# Altium PCB EVL1608C-TL-00A_layout.PcbDoc
Units mil, origin at the board's own origin, x right, y up, seen from the top; angles counter-clockwise.
Board outline 2500 x 2500 mil, 2 copper layers (Top Layer, Bottom Layer); 26 components, 7 nets, 54 pads, 278 vias.
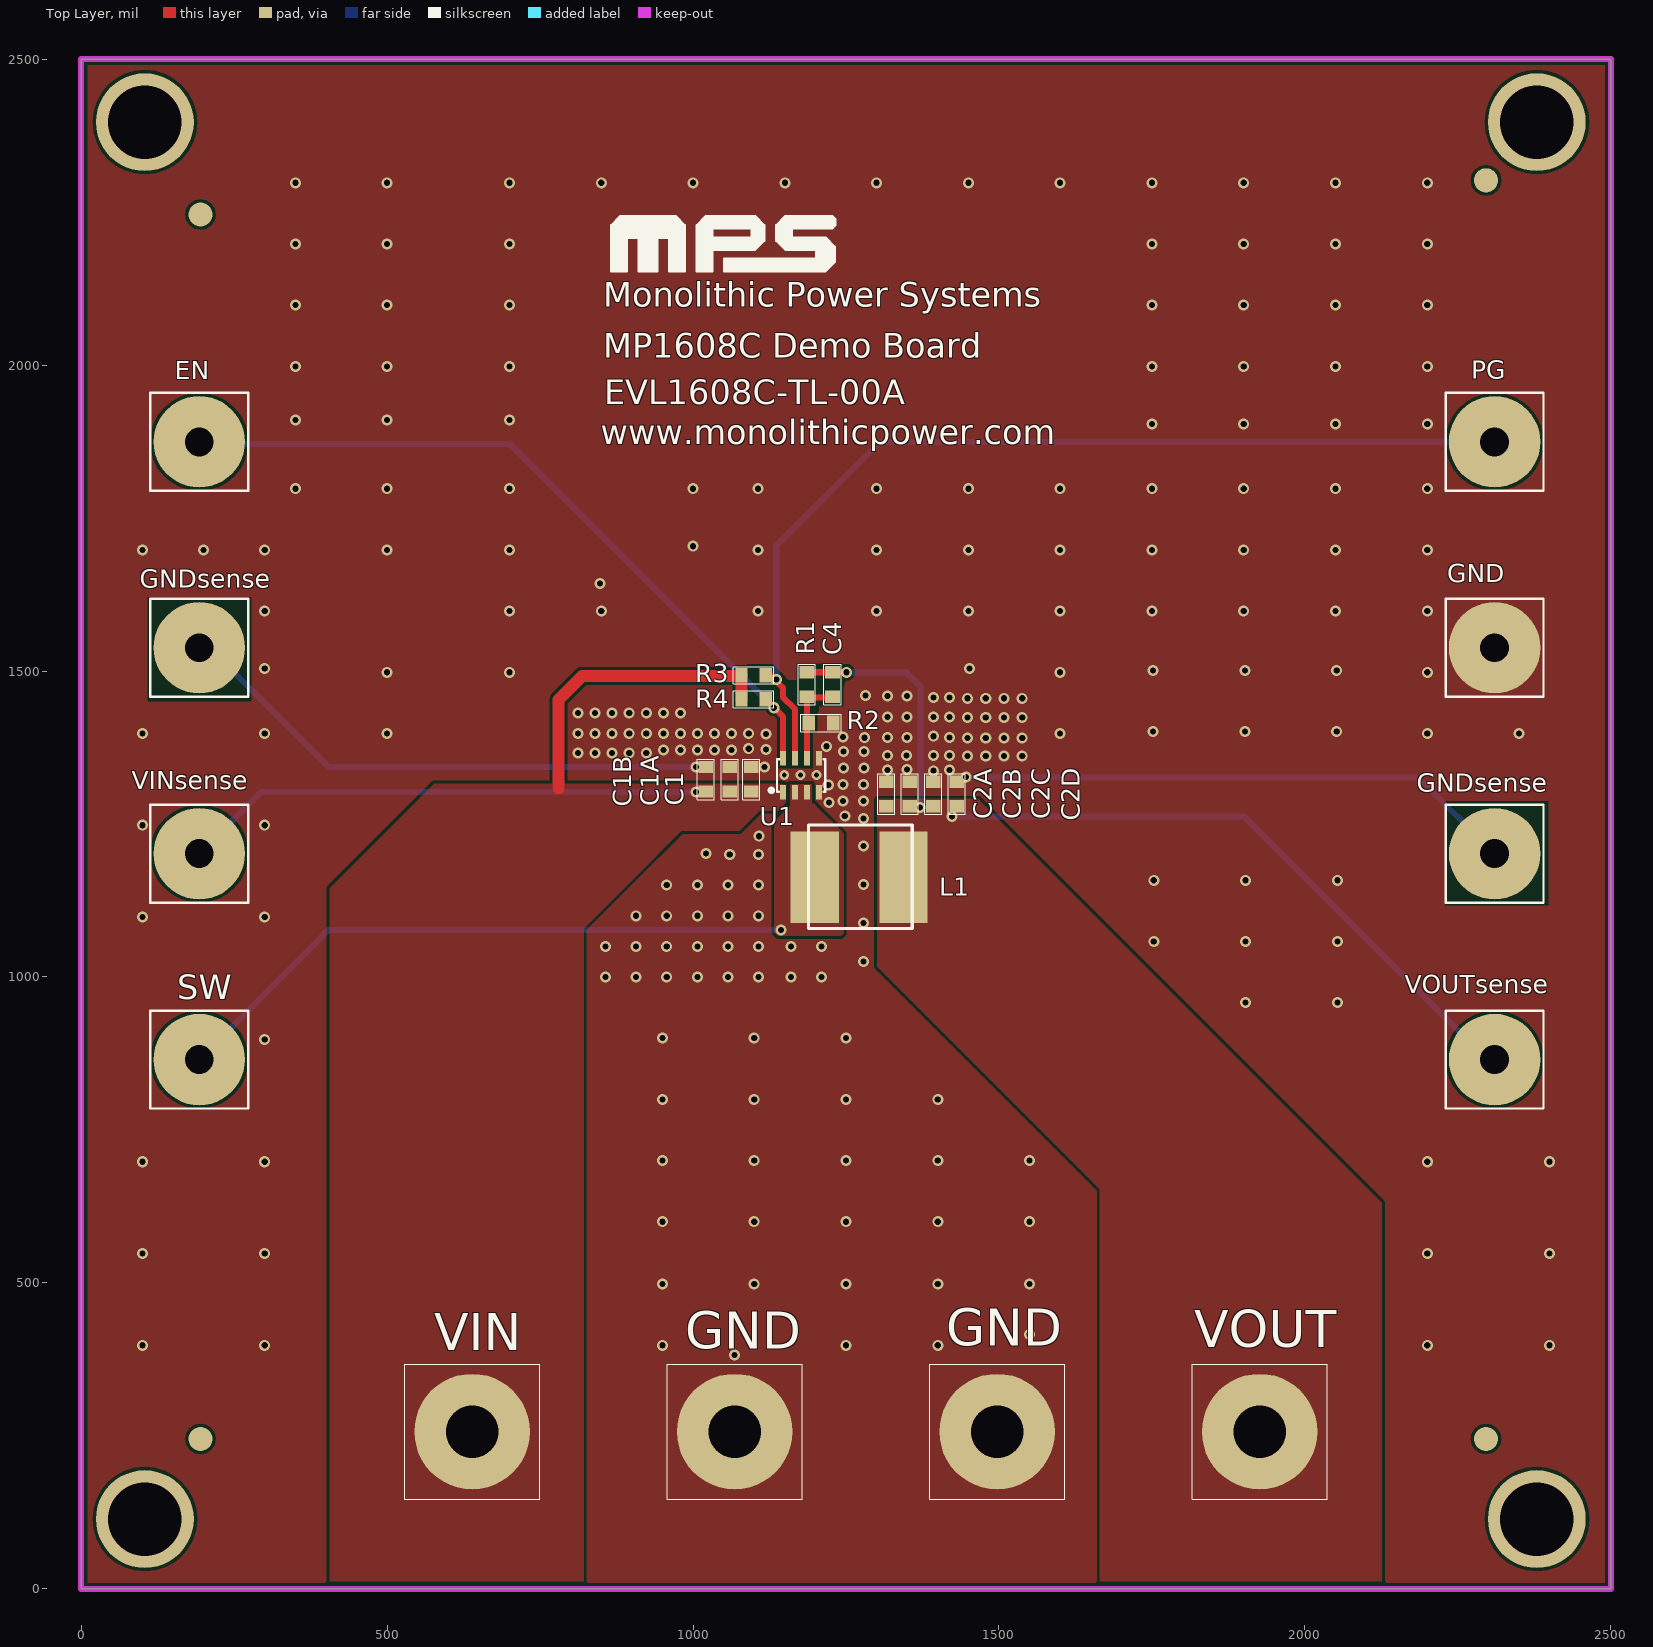
[diagram p0: Top Layer view]
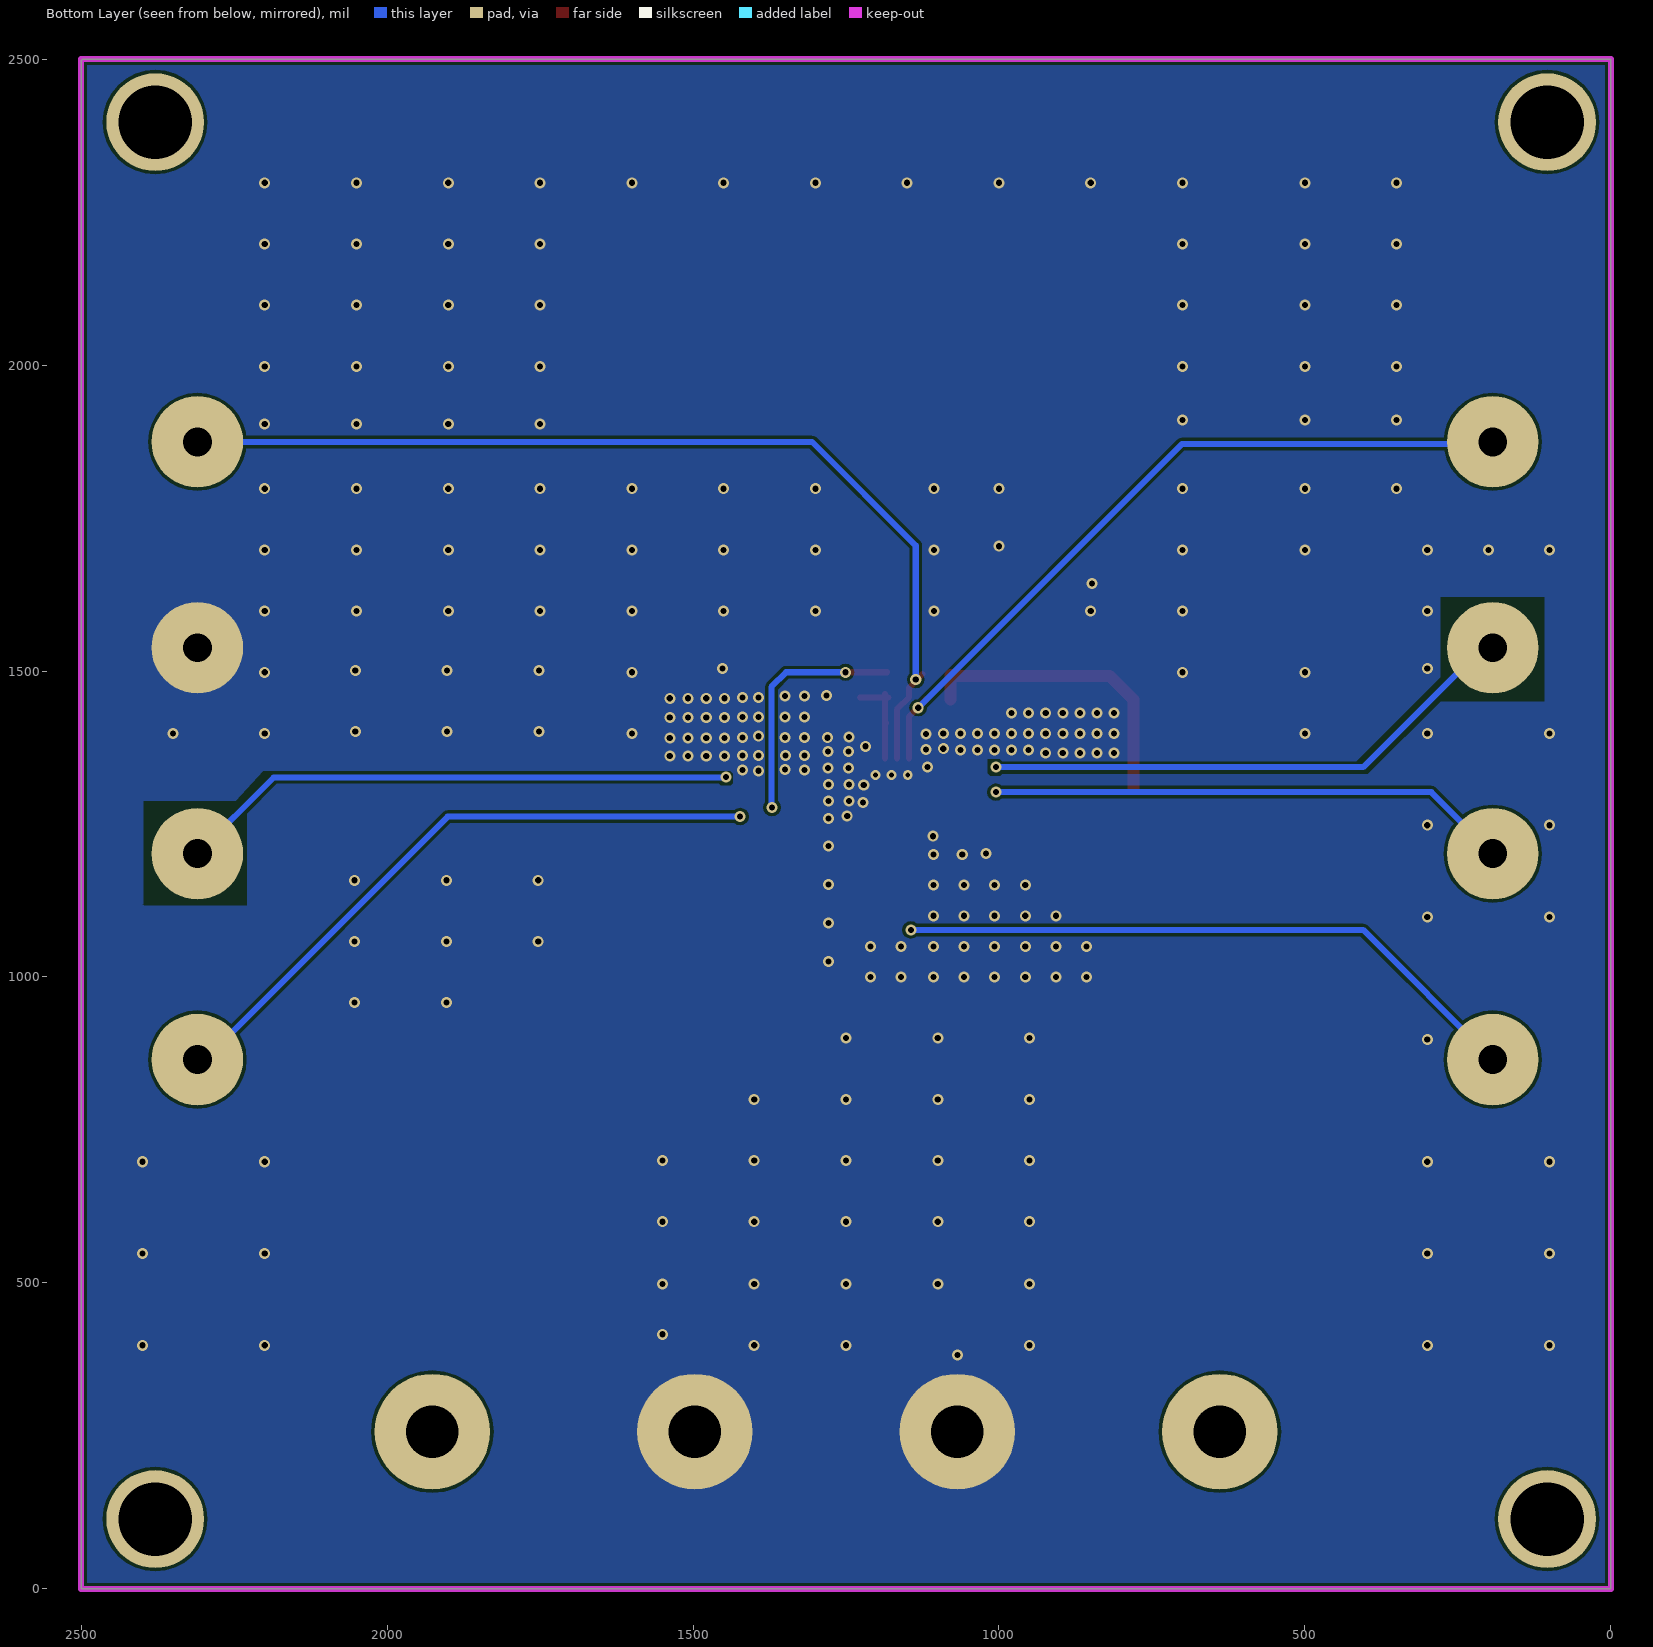
[diagram p1: Bottom Layer view, seen from below]

## Layer stack, top to bottom
Top Layer: signal copper 1.4
Dielectric: dielectric 12.6, FR-4, Dk 4.8
Bottom Layer: signal copper 1.4

## Board outline
0,2500 0,0 2500,0 2500,2498 2498,2500 7,2500

## Design rules (kind name [scope] priority, off if disabled: settings)
Clearance [All] p1: gap=5
ComponentClearance [All] p1: gap=2 collisioncheckmode=3 verticalgap=2 showdistances=FALSE
HoleSize [All] p1: absolutevalues=TRUE maxlimit=200 minlimit=1 maxpercent=80.000 minpercent=20.000
HoleToHoleClearance [All] p1: gap=0 allowstackedmicrovias=TRUE
MinimumSolderMaskSliver [All] p1: minsoldermaskwidth=0
PlaneConnect [All] p1: planeconnectstyle=Direct reliefexpansion=20 reliefentries=4 reliefconductorwidth=10 reliefairgap=10
PolygonConnect [All] p1: connectstyle=Direct reliefconductorwidth=10 reliefentries=4 polygonreliefangle="90 Angle"
RoutingVias [All] p1: holewidth=28 width=50 viastyle="Through Hole" minholewidth=28 minwidth=50 maxholewidth=28 maxwidth=50
SilkToSilkClearance [All] p1: silktosilkclearance=0
SilkscreenOverComponentPads [All] p1: minsilkscreentomaskgap=0
SolderMaskExpansion [All] p1: expansion=4
Width [All] p1: maxlimit=40 minlimit=10 preferedwidth=10
21 further rules are at their usual default settings.

## Classes and differential pairs
component class T-EVL1608-TL-00A: C1 C1A C1B C2A C2B C2C C2D C4 EN GNDsense L1 PG R1 R2 R3 R4 U1 VIN VINsense VOUT VOUTsense

## Components (designator, comment, footprint, x,y, rotation, side; value= is the part's Value field where it differs from the comment)
C1 "Cap" CAP/0402 1095,1343 r270 top
C1A "CAP\0603" CAP/0402 1060,1343 r270 top
C1B "CAP\0603" CAP/0402 1021,1343 r270 top
C2A "Cap" CAP/0402 1316,1319 r270 top
C2B "Cap" CAP/0402 1354.33,1319 r270 top
C2C "Cap" CAP/0402 1392.67,1319 r270 top
C2D "Cap" CAP/0402 1431,1319 r270 top
C4 "" CAP/0402 1228,1498 r270 top
EN "CONN/1MM" TP/1MM 195,1875 r0 top
GND "CONN/1MM" TP/2MM 1497,257 r0 top
GND "CONN/1MM" TP/2MM 1068,257 r0 top
GND "CONN/1MM" TP/1MM 2310.43,1536.07 r270 top
GNDsense "CONN/1MM" TP/1MM 195,1538.48 r0 top (schematic designator GND)
GNDsense "CONN/1MM" TP/1MM 2312,1201.95 r0 top (schematic designator GND)
L1 "COILCRAFT/LPO2506IB-682" MPL-AL4020-R47 1201,1164 r0 top
PG "CONN/1MM" TP/1MM 2312,1875 r0 top
R1 "RC(0603_50V0805_150V1206_200V2512_200V" RES/0402 1186,1457.98 r90 top
R2 "RC(0603_50V0805_150V1206_200V2512_200V" RES/0402 1229,1415 r180 top
R3 "RC(0603_50V0805_150V1206_200V2512_200V" RES/0402 1079,1493 r0 top
R4 "RC(0603_50V0805_150V1206_200V2512_200V" RES/0402 1079,1454 r0 top
SW "CONN/1MM" TP/1MM 191.02,864.59 r180 top
U1 "MP1608" SOT583 1147,1302 r90 top
VIN "CONN/2MM" TP/2MM 639,257 r0 top
VINsense "CONN/1MM" TP/1MM 192.59,1203.52 r90 top
VOUT "CONN/2MM" TP/2MM 1926,257 r0 top (schematic designator VOUT2)
VOUTsense "CONN/1MM" TP/1MM 2312,865.43 r0 top

## Footprints (in the part's own frame and the unit in brackets; to place one, negate y for a bottom-side part, rotate by r counter-clockwise, add the part's x,y. Pads: shape width x height; smd on the part's side, far side on the other; paste and mask are expansions set on the pad)
CAP/0402 [mil]
  rect 20x24 smd paste+0 mask+0: 1(0,0) 2(40,0)
  silkscreen extent -13,-14 53,14
MPL-AL4020-R47 [mil]
  rect 78.74x149.61 smd mask+2: 1(-2,-1) 2(143,-1)
  silkscreen extent -12,-85 157,84
RES/0402 [mil]
  rect 20x24 smd paste-1000: 1(0,0) 2(40,0)
  silkscreen extent -13,-14 53,14
SOT583 [mm]
  rect 0.6x0.25 smd mask+0.051: 1(0,0) 2(0,-0.5) 3(0,-1) 4(0,-1.5) 5(1.4,-1.5) 6(1.4,-1) 7(1.4,-0.5) 8(1.4,0)
  silkscreen extent 0.03,-1.75 1.37,0.51
TP/1MM [mm]
  round 3.8 hole 1.2 paste-0.05 mask+0.05: 1(-0.051,-0.011)
  silkscreen extent -2.08,-2.04 1.98,2.02
TP/2MM [mm]
  round 4.8 hole 2.184: 1(0,0)
  silkscreen extent -2.8,-2.8 2.8,2.8

## Part data
C1 C2A C2B C2C C2D: "50V Ceramic Capacitor"
C1A C1B: library part CAP0603, "CAP0603"
C4: library part CAP/0402, "{Description}"
EN GND GND GND GNDsense GNDsense PG SW VINsense VOUTsense: library part CONN/2MM, "{Description}"
L1: library part TOKO106C, "TOKO106C"
R1 R2 R3 R4: library part SMR, "Film resistor, 1%"
VIN VOUT: "{Description}"

## Free pads (board coordinates)
  round 160 hole 120: 0(104,114) 0(104,2397) 0(2379,114) 0(2379,2397)
  round 39.37 smd mask+2: 1(195,2246) 2(2296,2302) 3(2296,245) 4(195,245)

## Via types
v1: diameter 18, hole 10, Top Layer to Bottom Layer, tented both sides, 275 vias
v2: diameter 16, hole 8, Top Layer to Bottom Layer, tented both sides, 3 vias

## Nets (pads, with @x,y where several pads share a name; then routed paths per layer and width w, separated by ;. In a path a pad name is that pad's centre, name@x,y a point inside that pad or via, vN(x,y) a via of type N, cw(c..) or ccw(c..) an arc to the next point about the centre after c; other vN are vias at no path point)
EN: EN.1 R4.2 U1.8 | length 1213
  Top Layer w10: R4.2 1147,1426 U1.8
  Bottom Layer w10: EN.1@206,1871 701,1871 v1(1132,1440)
FB: C4.2 R1.1 R2.2 U1.6 | length 153.4
  Top Layer w10: R1.1@1181,1457 C4.2@1227,1457 ; R2.2@1185,1415 R2.2@1186.37,1413.63 ; U1.6 R2.2@1186.37,1413.63 ; R1.1@1186.37,1462.63 R2.2@1186.37,1413.63
GND: C1.1 C1A.1 C1B.1 C2A.1 C2B.1 C2C.1 C2D.1 GND.1 GNDsense.1 R2.1 U1.4 U1.5 | length 1783.4
  Bottom Layer w10: GNDsense.1@217,1531 405,1343 v1(1005,1343) ; v1@1444,1326 2185.54,1326 GNDsense.1@2310.01,1201.53
  other v1: 1068,382 100,398 300,398 950,398 1250,398 1400,398 2200,398 2400,398 1550,416 950,498 1100,498 1250,498 1400,498 1550,498 100,548 300,548 2200,548 2400,548 950,600 1100,600 1250,600 1400,600 1550,600 100,698 300,698 2200,698 2400,698 950,700 1100,700 1250,700 1400,700 1550,700 950,800 1100,800 1250,800 1400,800 300,898 950,900 1100,900 1250,900 1903,958 2053,958 857,1000 907,1000 957,1000 1007,1000 1057,1000 1107,1000 1160,1000 1210,1000 1278.5,1025 857,1050 907,1050 957,1050 1007,1050 1057,1050 1107,1050 1160,1050 1210,1050 1753,1058 1903,1058 2053,1058 1278.5,1088 100,1098 300,1098 907,1100 957,1100 1007,1100 1057,1100 1107,1100 957,1150 1007,1150 1057,1150 1107,1150 1278.5,1151 1753,1158 1903,1158 2053,1158 1060,1200 1107,1200 1021,1202 1278.5,1214 1108,1230 100,1248 300,1248 1278.5,1259 1248,1263 1222,1285 1245,1287.67 1278.5,1287.67 1221,1314 1245,1314.33 1278.5,1314.33 1446,1327 1393,1337 1318,1338 1419,1338 1350,1339 1246,1341.67 1279.5,1341.67 1117,1343 1448.6,1361 1478.4,1361 1508.2,1361 1538,1361 1318,1362 1349,1362 1393,1362 1419,1362 812,1366 839.9,1366 867.8,1366 895.7,1366 923.6,1366 1246,1368.33 1279.5,1368.33 951.5,1371 979.4,1371 1007.3,1371 1035.2,1371 1063.1,1371 1119,1372 1091,1373 1218,1377 1280,1391 1318,1391.5 1350,1391.5 1419,1391.5 1448.6,1390.5 1478.4,1390.5 1508.2,1390.5 1538,1390.5 1245,1392 1393,1393.5 1119,1397 100,1398 300,1398 500,1398 812,1398 839.9,1398 867.8,1398 895.7,1398 923.6,1398 951.5,1398 979.4,1398 1007.3,1398 1035.2,1398 1063.1,1398 1091,1398 1600,1398 2200,1398 2350,1398 1752,1401 1902,1401 2052,1401 1448.6,1424 1478.4,1424 1508.2,1424 1538,1424 1318,1425 1350,1425 1393,1425 1419,1425 812,1431.5 839.9,1431.5 867.8,1431.5 895.7,1431.5 923.6,1431.5 951.5,1431.5 979.4,1431.5 1448.6,1455.5 1478.4,1455.5 1508.2,1455.5 1538,1455.5 1393,1456.5 1419,1456.5 1318,1459 1350,1459 1282,1460 500,1498 700,1498 1600,1498 2200,1498 1752,1501 1902,1501 2052,1501 300,1504 1452,1504 300,1598 700,1598 850,1598 1106,1598 1300,1598 1450,1598 1600,1598 1750,1598 1900,1598 2050,1598 2200,1598 848,1643 100,1698 200,1698 300,1698 500,1698 700,1698 1106,1698 1300,1698 1450,1698 1600,1698 1750,1698 1900,1698 2050,1698 2200,1698 1000,1704 350,1798 500,1798 700,1798 1000,1798 1106,1798 1300,1798 1450,1798 1600,1798 1750,1798 1900,1798 2050,1798 2200,1798 1750,1904 1900,1904 2050,1904 2200,1904 350,1910 500,1910 700,1910 350,1998 500,1998 700,1998 1750,1998 1900,1998 2050,1998 2200,1998 350,2098 500,2098 700,2098 1750,2098 1900,2098 2050,2098 2200,2098 350,2198 500,2198 700,2198 1750,2198 1900,2198 2050,2198 2200,2198 350,2298 500,2298 700,2298 850,2298 1000,2298 1150,2298 1300,2298 1450,2298 1600,2298 1750,2298 1900,2298 2050,2298 2200,2298
  other v2: 1149,1330 1175.5,1330 1202,1330
PG: PG.1 R3.2 U1.7 | length 1621.4
  Top Layer w10: R3.2@1125,1495 1147,1473 1147,1457 1166.69,1437.32 U1.7
  Bottom Layer w10: v1@1134,1484 v1@1134,1487 ; v1(1136,1486) 1136,1705 1305.58,1874.58 PG.1
SW: L1.1 SW.1 U1.2 U1.3 | length 1038.8
  Bottom Layer w10: SW.1 405,1077 v1(1144,1077)
VIN: C1.2 C1A.2 C1B.2 R3.1 R4.1 U1.1 VIN.1 VINsense.1 | length 1352.6
  Top Layer w20: 780,1308 780,1453 819,1492 1076,1492 R3.1@1078,1490 ; R4.1 R3.1
  Bottom Layer w10: VINsense.1 293.48,1302 v1(1005,1302)
VOUT: C2A.2 C2B.2 C2C.2 C2D.2 C4.1 L1.2 R1.2 VOUT.1 VOUTsense.1 | length 1442.4
  Top Layer w10: R1.2@1183,1498 v1@1249,1498
  Bottom Layer w10: v1(1251,1498) 1348,1498 1372,1474 v1@1372,1280 ; v1(1423,1262) 1901,1262 2297.99,865.01 VOUTsense.1
  other v1: 1371,1277

## Polygon pours and split planes (outlines as drawn)
GND on Top Layer "Top Layer-No Net 1" (solid, remove dead copper, pour order 13): 10.98,2490.3 10.98,-9.7 2510.98,-9.7 2510.98,2490.3 10.98,2490.3
GND on Top Layer "Top Layer-No Net 1" (solid, remove dead copper, pour order 17): 1201,1345.5 1200,1346.5 1200,1367.5 1200,1382.5 1209,1391.5 1219,1401.5 1219,1428.5 1219,1429.5 1222,1432.5 1225,1435.5 1244,1435.5 1269,1435.5 1271,1433.5 1275,1429.5 1275,1413.5 1275,1395.5 1274,1394.5 1273,1393.5 1261,1393.5 1250,1393.5 1240,1383.5 1226,1369.5 1226,1356.5 1226,1354.5 1220,1348.5 1217,1345.5 1202,1345.5
VIN on Top Layer "Top Layer-No Net 1" (solid, remove dead copper, pour order 19): 1151.86,1316 577,1316 477,1216 406,1145 406,653 406,0 408,-2 412,2 821,2 821,1079 902,1160 981,1239 1074,1239 1076,1239 1100,1263 1109,1272 1131,1272 1140,1272 1151,1283 1152,1284 1152,1316
VOUT on Top Layer "Top Layer-No Net 1" (solid, remove dead copper, pour order 23): 1301,1290 1301,1017 1383,935 1665,653 1665,-1 2123,-1 2129,-7 2126,-4 2126,600 2126,631 1473,1284 1466,1291 1302,1291
SW on Top Layer "Top Layer-No Net 1" (solid, remove dead copper, pour order 24): 1194.13,1315 1159,1315 1159,1282 1159,1280 1148,1269 1133,1254 1133,1119 1133,1073 1139,1067 1153,1067 1242,1067 1245,1070 1246,1071 1246,1099 1246,1235 1200,1281 1195,1286 1195,1315
GND on Bottom Layer "Top Layer-No Net 1" (solid, remove dead copper, pour order 15): 10.2,2503.64 4.2,2497.64 4.2,9.64 2504.2,9.64 2496.2,17.64 2496.2,2504.64 -2.8,2504.64 -3.8,2505.64

## Keep-outs
Keep-Out Layer:
  lines w10: 2500,0 0,0 0,29 0,2500 2500,2500 ; 2500,1 2500,109 2500,2498

## Other copper
Top Layer:
  pour cut-out: 1248,1476 1248,1486 1156,1486 1130,1512 1088,1512 1088,1438 1096,1435 1192,1436 1195,1433 1196,1434 1206,1434 1206,1443 1207,1442 1246,1442 1246,1474
  pour cut-out: 1203,1512.98 1211,1512.98 1211,1508.2 1203,1508.2
Bottom Layer:
  pour cut-out: 2291.5,1237.5 2202.5,1336.5 1439,1336.5 1435,1332.5 1435,1316.5 1438,1313.5 1455,1313.5 1458,1316.5 2154,1316.5 2181,1316 2279.5,1215.5 2283,1217.5 2289.5,1219.5 2295.5,1226.5
  pour cut-out: 270,1457 272,1457 397,1332 995,1332 998,1329 1014,1329 1018,1333 1018,1356 999,1356 995,1352 416,1352 256,1512 247,1503 247,1485 278,1454
Multi-Layer:
  pour cut-out: 2229,1287 2229,1117 2397,1117 2399,1119 2398,1120 2398,1287
  pour cut-out: 109,1621 109,1451 277,1451 279,1453 278,1454 278,1621

## Silkscreen, mask and mechanical layers (free items; w line width, h text height)
Top Overlay:
  region: 1051.3,2173.51 1201.3,2173.51 1201.3,2188.51 1151.3,2188.51 1136.3,2203.51 1136.3,2228.51 1151.3,2243.51 1226.3,2243.51 1232.3,2238.51 1232.3,2228.51 1227.3,2223.51 1161.3,2223.51 1161.3,2208.51 1216.3,2208.51 1231.3,2193.51 1231.3,2168.51 1216.3,2153.51 1051.3,2153.51
  region: 1006.3,2153.51 1006.3,2208.51 1116.3,2208.51 1116.3,2203.51 1101.3,2188.51 1031.3,2188.51 1031.3,2153.51
  region: 1006.3,2204.51 1006.3,2228.51 1020.3,2243.51 1101.3,2243.51 1116.3,2228.51 1116.3,2204.51 1095.3,2204.51 1095.3,2223.51 1030.3,2223.51 1030.3,2204.51
  region: 961.3,2153.51 961.3,2208.51 941.3,2208.51 941.3,2153.51 911.3,2153.51 911.3,2208.51 891.3,2208.51 891.3,2153.51 866.3,2153.51 866.3,2228.51 881.3,2243.51 971.3,2243.51 986.3,2228.51 986.3,2153.51
  lines w4: 866.3,2153.51 891.3,2153.51 891.3,2208.51 911.3,2208.51 911.3,2153.51 941.3,2153.51 941.3,2208.51 961.3,2208.51 961.3,2153.51 986.3,2153.51 986.3,2228.51 971.3,2243.51 881.3,2243.51 866.3,2228.51 866.3,2153.51 ; 1006.3,2153.51 1006.3,2228.51 1021.3,2243.51 1101.3,2243.51 1116.3,2228.51 1116.3,2203.51 1101.3,2188.51 1031.3,2188.51 1031.3,2153.51 1006.3,2153.51 ; 1031.3,2208.51 1031.3,2223.51 1096.3,2223.51 1096.3,2208.51 1031.3,2208.51 ; 1051.3,2153.51 1216.3,2153.51 1231.3,2168.51 1231.3,2178.51 1231.3,2193.51 1216.3,2208.51 1161.3,2208.51 1161.3,2223.51 1227.3,2223.51 1232.3,2228.51 1232.3,2238.51 1227.3,2243.51 1151.3,2243.51 1136.3,2228.51 1136.3,2208.51 1136.3,2203.51 1151.3,2188.51 1201.3,2188.51 1201.3,2173.51 1051.3,2173.51 1051.3,2153.51
  text "Monolithic Power Systems" at 853,2095 h40
  text "MP1608C Demo Board" at 853,2012 h40
  text "EVL1608C-TL-00A" at 855,1936 h40
  text "www.monolithicpower.com" at 849,1871 h40

## Dimensions
2496,2528 to -4,2528 on Keep-Out Layer
2550,-2 to 2550,2498 on Keep-Out Layer